# Altium PCB Top.PcbDoc
Units mm, origin at the board's own origin, x right, y up, seen from the top; angles counter-clockwise.
Board outline 42 x 21.72 mm, 2 copper layers (Top Layer, Bottom Layer), stack 1.671 mm thick; 35 components, 43 nets, 173 pads, 52 vias.
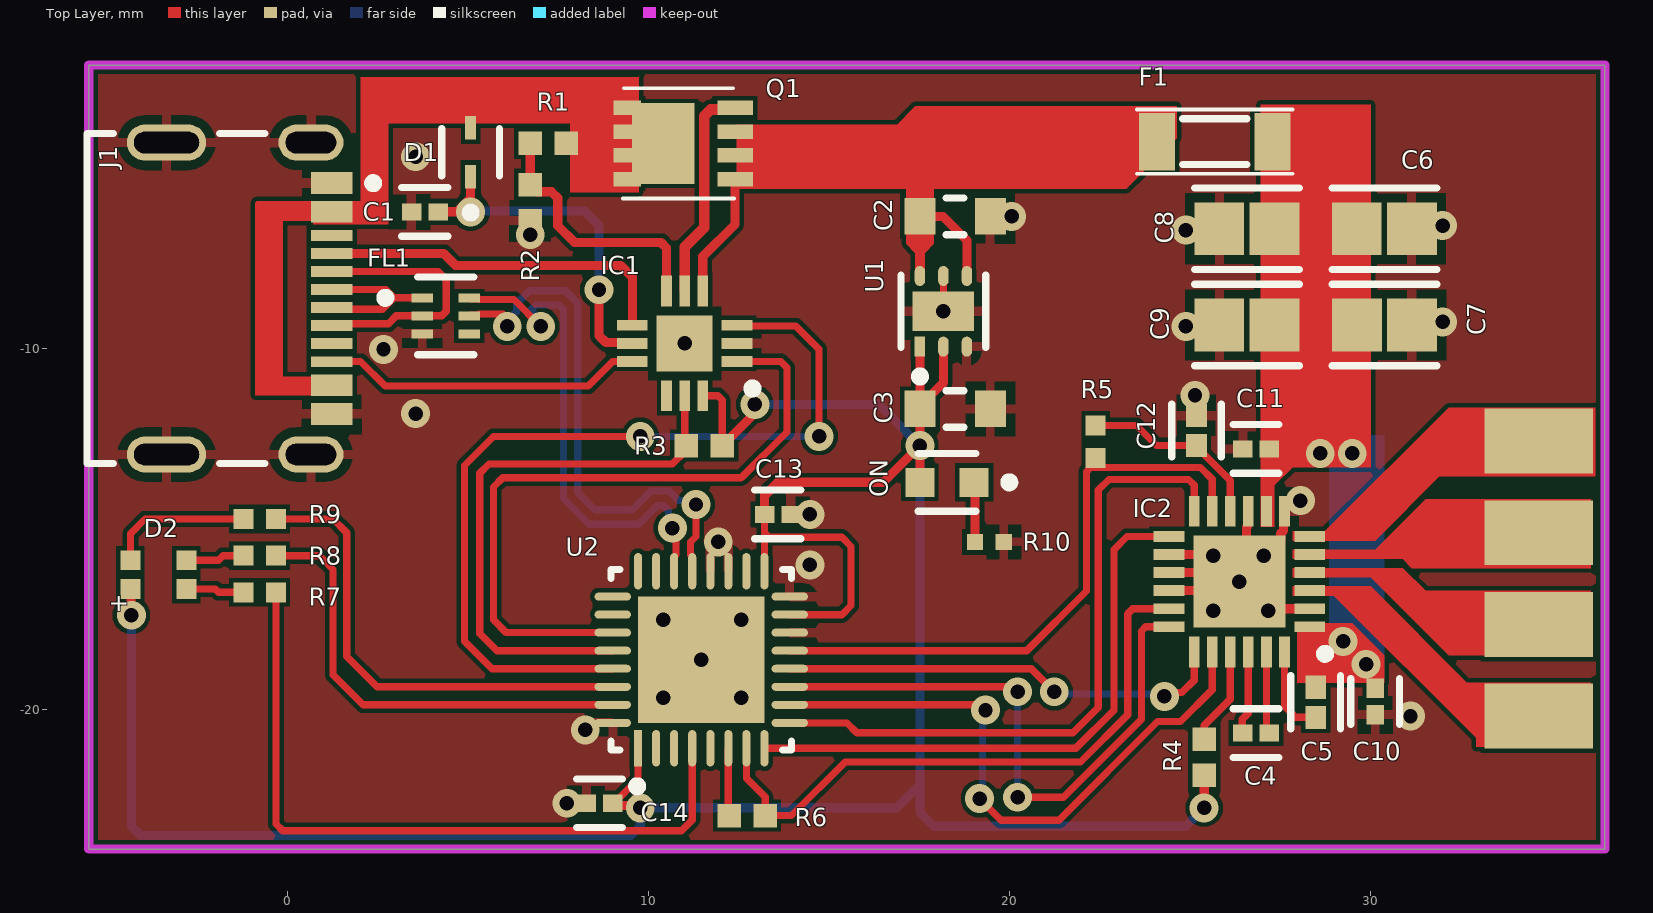
[diagram p0: Top Layer view]
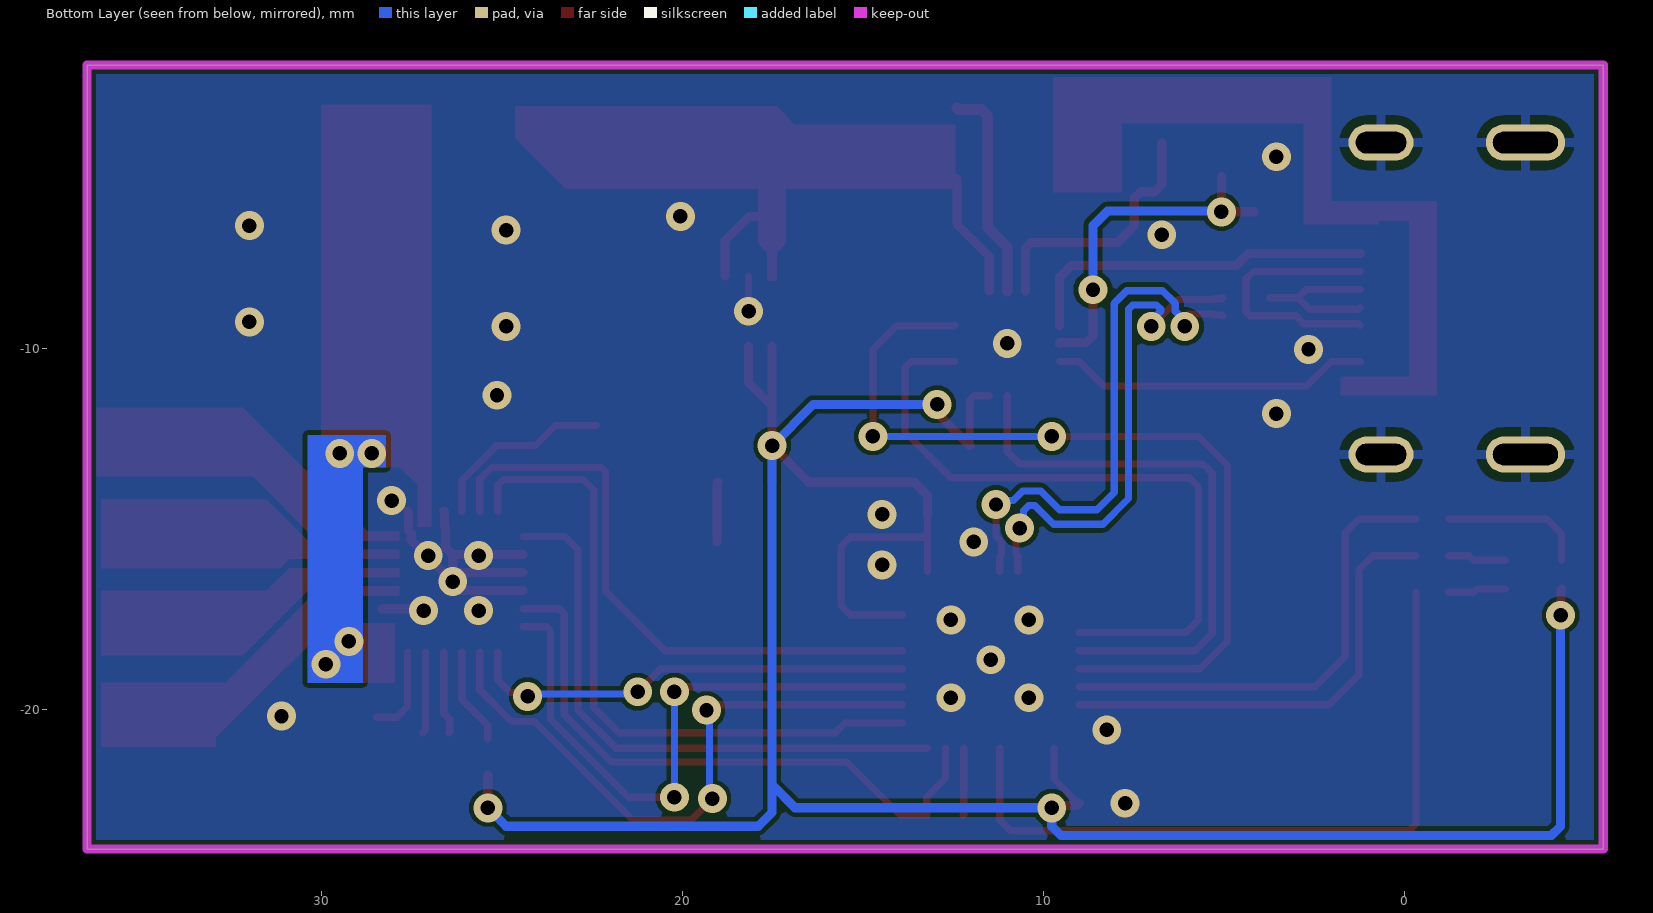
[diagram p1: Bottom Layer view, seen from below]
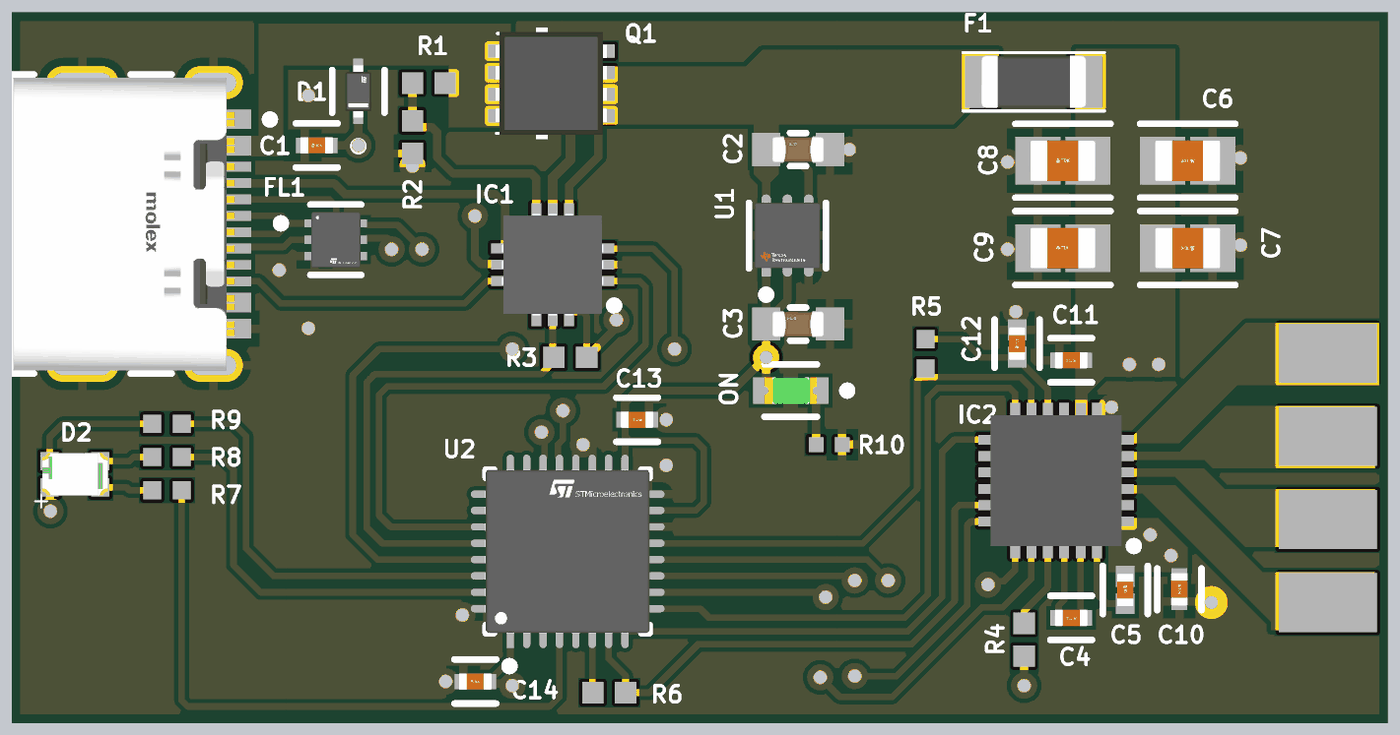
[diagram p2: 3D render of the assembled board from above, using the file's embedded part models]

## Layer stack, top to bottom
Top Solder: solder mask 0.0102, Solder Resist, Dk 3.5
Top Layer: signal copper 0.0356
Dielectric 1: dielectric 1.6, FR-4, Dk 4.8
Bottom Layer: signal copper 0.0356
Bottom Solder: solder mask 0.0102, Solder Resist, Dk 3.5

## Board outline
-5.5,-23.876 -5.5,-2.159 36.5,-2.159 36.5,-23.876

## Design rules (kind name [scope] priority, off if disabled: settings)
Clearance [All] p1: gap=0.127 ignorepadtopadclearanceinfootprint=FALSE
DiffPairsRouting [All] p1: maxlimit=0.254 minlimit=0.2 mostfreqgap=0.2 toplayer_minwidth=0.2 toplayer_maxwidth=0.3 toplayer_prefwidth=0.3 bottomlayer_minwidth=0.2 bottomlayer_maxwidth=0.3 bottomlayer_prefwidth=0.3 maxuncoupledlength=12.7
PolygonConnect [isvia] p1: connectstyle=Direct reliefconductorwidth=0.254 reliefentries=4 polygonreliefangle="90 Angle" airgapwidth=0.254
PolygonConnect PolygonConnect_1 [All] p2: connectstyle=Relief reliefconductorwidth=0.254 reliefentries=4 polygonreliefangle="90 Angle" airgapwidth=0.254
RoutingVias [All] p1: holewidth=0.4 width=0.8 viastyle="Through Hole" minholewidth=0.4 minwidth=0.8 maxholewidth=0.4 maxwidth=0.8
SilkToSilkClearance [All] p1: silktosilkclearance=0.1
SilkToSolderMaskClearance [IsPad] p1: minsilkscreentomaskgap=0.1 clearancetoexposedcopper=TRUE
SolderMaskExpansion [All] p1: expansion=0.102 istentingtop=FALSE
Width [All] p1: maxlimit=1 minlimit=0.2 preferedwidth=0.3
27 further rules are at their usual default settings.

## Classes and differential pairs
component class DRIVER: C4 C5 C6 C7 C8 C9 C10 C11 C12 DU1 F1 IC2 M1 R4 R5 R6
component class MCU: C13 C14 D2 R7 R8 R9 U2
component class USB_PD: C1 C2 C3 D1 FL1 IC1 J1 ON Q1 R1 R2 R3 R10 U1
differential pair USB_D: +USB_D_P -USB_D_N
differential pair USBC_D: +USBC_D_P -USBC_D_N

## Components (designator, comment, footprint, x,y, rotation, side; value= is the part's Value field where it differs from the comment)
C1 "C1005X7R1H104K050BB" FP-C1005-050-0_05-IPC_C 3.81,-6.223 r0 top
C2 "C1608X5R1E106M080AC" FP-C1608-080-IPC_A 18.501,-6.35 r180 top
C3 "C1608X5R1E106M080AC" FP-C1608-080-IPC_A 18.501,-11.684 r180 top
C4 "C1005X7R1H223K050BB" FP-C1005-050-0_05-IPC_C 26.836,-20.662 r180 top
C5 "C1005X7R1V224K050BC" FP-C1005-050-0_05-IPC_B 28.487,-19.809 r270 top
C6 "C2012X5R1V106K125AC" FP-C2012-125-0_2-IPC_B 30.39,-6.692 r180 top
C7 "C2012X5R1V106K125AC" FP-C2012-125-0_2-IPC_B 30.394,-9.359 r180 top
C8 "C2012X5R1V106K125AC" FP-C2012-125-0_2-IPC_B 26.584,-6.692 r0 top
C9 "C2012X5R1V106K125AC" FP-C2012-125-0_2-IPC_B 26.584,-9.359 r0 top
C10 "C1005X7R1H104K050BB" FP-C1005-050-0_05-IPC_C 30.138,-19.787 r270 top
C11 "C1005X7R1H104K050BB" FP-C1005-050-0_05-IPC_C 26.836,-12.788 r180 top
C12 "C1005X5R1V474K050BC" FP-C1005-050-0_05-IPC_B 25.185,-12.28 r90 top
C13 "C1005X7R1H104K050BB" FP-C1005-050-0_05-IPC_C 13.589,-14.605 r180 top
C14 "C1005X7R1H104K050BB" FP-C1005-050-0_05-IPC_C 8.65,-22.606 r0 top
D1 "BAT54KFILM" FP-SOD-523-MFG 5.08,-4.572 r90 top value=7pF
D2 "LED-RGB" XL-2012RGBC -3.569,-16.275 r0 top
F1 "" R1206 25.693,-4.279 r0 top
FL1 "ECMF02-2AMX6" FP-QFN-6L-MFG 4.391,-9.105 r0 top
IC1 "TCPP01-M12" QFN50P300X300X100-13N-D 11.01,-9.867 r180 top
IC2 "DRV8424RGER" QFN50P400X400X100-25N-D 26.373,-16.467 r180 top
J1 "217179-0001" FP-2171790001-MFG -2.194,-8.625 r270 top
ON "LTST-C191KGKT" FP-LTST-C191KGKT-MFG 18.276,-13.716 r180 top
Q1 "SI7804DN-T1-E3" SIS862DNT1GE3 10.852,-4.328 r180 top
R1 "ERJ-2GEJ103X" RESC1005X40X25ML05T05 7.231,-4.318 r0 top
R2 "ERJ-2GEJ911X" RESC1005X40X25ML05T05 6.731,-5.969 r90 top
R3 "ERJ-2GEJ103X" RESC1005X40X25ML05T05 11.549,-12.7 r0 top
R4 "ERJ-2GEJ103X" RESC1005X40X25ML05T05 25.4,-21.328 r90 top
R5 "ERJ-2GEJ152X" RESC1005X40X25NL05T05 22.391,-12.592 r270 top
R6 "ERJ-2GEJ334X" RESC1005X40X25ML05T05 12.739,-22.948 r0 top
R7 "ERJ-2GEJ331X" RESC1005X40X25NL05T05 -0.762,-16.764 r180 top
R8 "ERJ-2GEJ331X" RESC1005X40X25NL05T05 -0.762,-15.748 r180 top
R9 "ERJ-2GEJ331X" RESC1005X40X25NL05T05 -0.762,-14.732 r180 top
R10 "ERJ2RKF2200X" RESC1005X40X25LL05T05 19.45,-15.367 r0 top
U1 "TLV76733DRVR" FP-DRV0006A-IPC_C 18.176,-8.979 r90 top
U2 "STM32G431KBU6" FP-UFQFPN32-A0B8-IPC_A 11.469,-18.63 r90 top

## Footprints (in the part's own frame and the unit in brackets; to place one, negate y for a bottom-side part, rotate by r counter-clockwise, add the part's x,y. Pads: shape width x height; smd on the part's side, far side on the other; paste and mask are expansions set on the pad)
FP-2171790001-MFG [mm]
  rrect100% 1x1.8 hole 1.4 slot 0.6 at 0 deg paste-2539.97 mask+0: 1(-4.32,2.85) 2(4.32,2.85)
  rrect100% 1x2.2 hole 1.8 slot 0.6 at 0 deg paste-2539.97 mask+0: 3(-4.32,-1.15) 4(4.32,-1.15)
  rect 0.6x1.15 smd paste+0 mask+0: A1-B12(-3.2,3.425) A4-B9(-2.4,3.425) B1-A12(3.2,3.425) B4-A9(2.4,3.425)
  rect 0.3x1.15 smd paste+0 mask+0: A5(-1.25,3.425) A6(-0.25,3.425) A7(0.25,3.425) A8(1.25,3.425) B5(1.75,3.425) B6(0.75,3.425) B7(-0.75,3.425) B8(-1.75,3.425)
  silkscreen extent -4.57,-3.35 4.57,4.7, body extent -4.92,-3.45 4.92,4.1, height 0.25
FP-C1005-050-0_05-IPC_B [mm]
  rect 0.639x0.572 smd paste+0 mask+0: 1(-0.417,0) 2(0.417,0)
  silkscreen extent -0.74,-0.69 0.74,0.69, body extent -0.89,-0.44 0.89,0.44, height 0.25
FP-C1005-050-0_05-IPC_C [mm]
  rect 0.539x0.472 smd paste+0 mask+0: 1(-0.367,0) 2(0.367,0)
  silkscreen extent -0.64,-0.67 0.64,0.67, body extent -0.74,-0.38 0.74,0.38, height 0.25
FP-C1608-080-IPC_A [mm]
  rect 0.862x1.012 smd paste+0 mask+0: 1(-0.975,0) 2(0.975,0)
  silkscreen extent -0.24,-0.51 0.24,0.51, body extent -1.91,-1.01 1.91,1.01, height 0.25
FP-C2012-125-0_2-IPC_B [mm]
  rect 1.378x1.456 smd paste+0 mask+0: 1(-0.764,0) 2(0.764,0)
  silkscreen extent -1.45,-1.13 1.45,1.13, body extent -1.7,-0.98 1.7,0.98, height 0.25
FP-DRV0006A-IPC_C [mm]
  rect 0.556x0.292 smd paste+0 mask+0: 1(-0.978,0.65)
  rrect100% 0.556x0.292 smd paste+0 mask+0: 2(-0.978,0) 3(-0.978,-0.65) 4(0.978,-0.65) 5(0.978,0) 6(0.978,0.65)
  rect 1.1x1.7 smd paste-1000 mask+0: 7(0,0)
  silkscreen extent -1.93,-1.17 1,1.17, body extent -1.36,-1.1 1.36,1.1, height 0.25
FP-LTST-C191KGKT-MFG [mm]
  rect 0.8x0.8 smd paste+0 mask+0: 1(-0.75,0) 2(0.75,0)
  silkscreen extent -1.85,-0.8 0.8,0.8, body extent -1.25,-0.55 1.25,0.55, height 0.25
FP-QFN-6L-MFG [mm]
  rect 0.6x0.25 smd paste+0 mask+0: 1(-0.65,0.5) 2(-0.65,0) 3(-0.65,-0.5) 4(0.65,-0.5) 5(0.65,0) 6(0.65,0.5)
  silkscreen extent -1.8,-1.07 0.77,1.07, body extent -1.05,-0.97 1.05,0.97, height 0.25
FP-SOD-523-MFG [mm]
  rect 0.65x0.3 smd paste+0 mask+0: 1(-0.675,0) 2(0.675,0)
  silkscreen extent -1.8,-0.8 0.65,0.8, body extent -1.1,-0.55 1.1,0.55, height 0.25
FP-UFQFPN32-A0B8-IPC_A [mm]
  rect 1.01x0.222 smd paste+0 mask+0: 1(-2.451,1.75)
  rrect100% 1.01x0.222 smd paste+0 mask+0: 2(-2.451,1.25) 3(-2.451,0.75) 4(-2.451,0.25) 5(-2.451,-0.25) 6(-2.451,-0.75) 7(-2.451,-1.25) 8(-2.451,-1.75) 17(2.451,-1.75) 18(2.451,-1.25) 19(2.451,-0.75) 20(2.451,-0.25) 21(2.451,0.25) 22(2.451,0.75) 23(2.451,1.25) 24(2.451,1.75)
  rrect100% 0.222x1.01 smd paste+0 mask+0: 9(-1.75,-2.451) 10(-1.25,-2.451) 11(-0.75,-2.451) 12(-0.25,-2.451) 13(0.25,-2.451) 14(0.75,-2.451) 15(1.25,-2.451) 16(1.75,-2.451) 25(1.75,2.451) 26(1.25,2.451) 27(0.75,2.451) 28(0.25,2.451) 29(-0.25,2.451) 30(-0.75,2.451) 31(-1.25,2.451) 32(-1.75,2.451)
  rect 3.5x3.5 smd paste-1000 mask+0: 33(0,0)
  silkscreen extent -3.63,-2.5 2.5,2.5, body extent -3.46,-3.46 3.46,3.46, height 0.25
QFN50P300X300X100-13N-D [mm]
  rect 0.85x0.3 smd: 1(-1.45,0.5) 2(-1.45,0) 3(-1.45,-0.5) 7(1.45,-0.5) 8(1.45,0) 9(1.45,0.5)
  rect 0.3x0.85 smd: 4(-0.5,-1.45) 5(0,-1.45) 6(0.5,-1.45) 10(0.5,1.45) 11(0,1.45) 12(-0.5,1.45)
  rect 1.55x1.55 smd: 13(0,0)
  silkscreen extent -2,1.13 -1.75,1.37, body extent -1.55,-1.55 1.55,1.55, height 1
QFN50P400X400X100-25N-D [mm]
  rect 0.85x0.3 smd: 1(-1.95,1.25) 2(-1.95,0.75) 3(-1.95,0.25) 4(-1.95,-0.25) 5(-1.95,-0.75) 6(-1.95,-1.25) 13(1.95,-1.25) 14(1.95,-0.75) 15(1.95,-0.25) 16(1.95,0.25) 17(1.95,0.75) 18(1.95,1.25)
  rect 0.3x0.85 smd: 7(-1.25,-1.95) 8(-0.75,-1.95) 9(-0.25,-1.95) 10(0.25,-1.95) 11(0.75,-1.95) 12(1.25,-1.95) 19(1.25,1.95) 20(0.75,1.95) 21(0.25,1.95) 22(-0.25,1.95) 23(-0.75,1.95) 24(-1.25,1.95)
  rect 2.55x2.55 smd: 25(0,0)
  silkscreen extent -2.5,1.88 -2.25,2.12, body extent -2,-2 2,2, height 1
R1206 [mm]
  rect 1x1.6 smd: 1(1.6,0) 2(-1.6,0)
  silkscreen extent -2.16,-0.89 2.16,0.89, body extent -1.6,-0.8 1.6,0.8, height 1
RESC1005X40X25LL05T05 [mm] "Chip Resistor, 2-Leads, Body 1.00x0.50mm, IPC High Density"
  rect 0.45x0.45 smd: 1(-0.4,0) 2(0.4,0)
  body extent -0.53,-0.27 0.53,0.28, height 0.4
RESC1005X40X25ML05T05 [mm] "Chip Resistor, 2-Leads, Body 1.00x0.50mm, IPC Low Density"
  rect 0.65x0.65 smd: 1(-0.5,0) 2(0.5,0)
  body extent -0.53,-0.27 0.53,0.28, height 0.4
RESC1005X40X25NL05T05 [mm] "Chip Resistor, 2-Leads, Body 1.00x0.50mm, IPC Medium Density"
  rect 0.55x0.55 smd: 1(-0.45,0) 2(0.45,0)
  body extent -0.53,-0.27 0.53,0.28, height 0.4
SIS862DNT1GE3 [mm]
  rect 0.99x0.405 smd: 1(-1.555,0.992) 2(-1.555,0.332) 3(-1.555,-0.328) 4(-1.555,-0.988)
  rect 0.51x0.405 smd: 5(1.555,-0.988) 6(1.555,-0.328) 7(1.555,0.332) 8(1.555,0.992)
  rect 1.725x2.235 smd: 9(0.438,0.002)
  rect 0.25x0.077 smd: 10(1.175,-1.156) 11(1.175,1.156)
  silkscreen extent -1.53,-1.53 1.56,1.53, body extent -1.82,-1.7 1.59,1.7, height 1.12
XL-2012RGBC [mm]
  rect 0.55x0.55 smd: 1(-0.775,0.4) 2(0.775,0.4) 3(-0.775,-0.4) 4(0.775,-0.4)
  body extent -1,-0.65 1,0.65, height 0.5

## Part data
C1 C10 C11 C13 C14: library part CMP-2000-05393-2, "Multilayer Ceramic Capacitors 100nF ±10% 50V X7R SMD 0402", Capacitance=100nF, Case Code (Imperial)=0402, Case Code (Metric)=1005, Dielectric=X7R, Dielectric Material=Ceramic, Max Operating Temperature=125°C, Min Operating Temperature=-55°C, Package Quantity=1, Tolerance=10%, Voltage=50V, Case/Package=0402, Construction=Flat, Depth=0.5mm, Height=0.5mm, Lead Free="Lead Free", Length=1mm, Mount="Surface Mount", Packaging="Tape and Reel", Radiation Hardening=No, REACH SVHC="No SVHC", Resistor Type=Ceramic, RoHS Compliant=Yes, Series=C, Termination=SMD/SMT, Thickness=0.022inch, Voltage Rating=50V, Voltage Rating (DC)=50V, Weight=2.3E-05oz, Width=0.02inch
C2 C3: library part CMP-2000-05442-2, "CAP CER 10UF 25V X5R 0603", Capacitance=10uF, Case Code (Imperial)=0603, Case Code (Metric)=1608, Dielectric=X5R, Dielectric Material=Ceramic, Max Operating Temperature=85°C, Min Operating Temperature=-55°C, Package Quantity=1, Tolerance=20%, Voltage Rating=25V, Case/Package=0603, Construction=Flat, Depth=0.8mm, Height=0.8mm, Lead Free="Lead Free", Length=1.6mm, Mount="Surface Mount", Packaging="Tape and Reel", REACH SVHC="No SVHC", Resistor Type=Ceramic, RoHS Compliant=Yes, Series=C, Termination=SMD/SMT, Thickness=0.039inch, Voltage Rating (DC)=25V, Weight=7.1E-05oz, Width=0.8mm
C4: library part CMP-08246-004483-1, "Multilayer Ceramic Capacitors 22nF ±10% 50V X7R SMD 0402", Capacitance=22nF, Case Code (Imperial)=0402, Case Code (Metric)=1005, Dielectric=X7R, Dielectric Material=Ceramic, Max Operating Temperature=125°C, Min Operating Temperature=-55°C, Package Quantity=1, Tolerance=10%, Voltage Rating=50V, Case/Package=0402, Construction=Flat, Depth=0.5mm, Height=0.5mm, Lead Free="Lead Free", Length=1mm, Mount="Surface Mount", Number of Pins=2, Packaging="Tape and Reel", Radiation Hardening=No, REACH SVHC="No SVHC", Resistor Type=Ceramic, RoHS Compliant=Yes, Series=C, Termination=SMD/SMT, Thickness=0.022inch, Voltage Rating (DC)=50V, Weight=2.3E-05oz, Width=0.02inch
C5: library part CMP-08246-006551-1, "Multilayer Ceramic Capacitors 220nF ±10% 35V X7R SMD 0402", Capacitance=220nF, Case Code (Imperial)=0402, Case Code (Metric)=1005, Dielectric=X7R, Dielectric Material=Ceramic, Max Operating Temperature=125°C, Min Operating Temperature=-55°C, Package Quantity=10000, Tolerance=10%, Voltage Rating=35V, Case/Package=0402, Height=0.5mm, Lead Free="Lead Free", Length=0.039inch, Mount="Surface Mount", Packaging="Tape and Reel", RoHS Compliant=Yes, Termination=SMD/SMT, Thickness=0.022inch, Voltage Rating (DC)=35V, Weight=2.3E-05oz, Width=0.02inch
C6 C7 C8 C9: library part CMP-08246-003469-1, "Multilayer Ceramic Capacitors 10μF ±10% 35V X5R SMD 0805", Capacitance=10uF, Case Code (Imperial)=0805, Case Code (Metric)=2012, Dielectric=X5R, Dielectric Material=Ceramic, Max Operating Temperature=85°C, Min Operating Temperature=-55°C, Package Quantity=2000, Tolerance=10%, Voltage Rating=35V, Case/Package=0805, Height=1.25mm, Lead Free="Lead Free", Length=0.079inch, Mount="Surface Mount", Packaging="Tape and Reel", REACH SVHC="No SVHC", RoHS Compliant=Yes, Series=C, Termination=SMD/SMT, Thickness=0.057inch, Voltage Rating (DC)=35V, Weight=0.000194oz, Width=1.25mm
C12: library part CMP-08246-003870-1, "Multilayer Ceramic Capacitors 470nF ±10% 35V X5R SMD 0402", Capacitance=470nF, Case Code (Imperial)=0402, Case Code (Metric)=1005, Dielectric=X5R, Dielectric Material=Ceramic, Max Operating Temperature=85°C, Min Operating Temperature=-55°C, Package Quantity=10000, Tolerance=10%, Voltage Rating=35V, Case/Package=0402, Height=0.5mm, Lead Free="Lead Free", Length=0.039inch, Mount="Surface Mount", Packaging="Tape and Reel", RoHS Compliant=Yes, Series=C, Termination=SMD/SMT, Thickness=0.022inch, Voltage Rating (DC)=35V, Weight=2.3E-05oz, Width=0.02inch
D1: library part CMP-12187-000026-1, "DIODE SCHOTTKY 40V 300MA SOD523", Capacitance=7pF, Forward Current=300mA, Manufacturer=STMicroelectronics, Max Junction Temp=+150°C, Max Repetitive Reverse Voltage=40V, Max Surge Forward Current=1.25A, Package=SOD-523, Peak Reverse Current=1uA, Temperature="-40°C to +150°C", Temperature Range Low=-40°C, Automotive=No, Category=Diode, ComponentLink2Description=Datasheet, ComponentLink2URL=https://www.st.com/content/ccc/resource/technical/document/datasheet/07/50/54/f2/0d/ba/4a/79/CD00001322.pdf/files/CD00001322.pdf/jcr:content/translations/en.CD00001322.pdf, Device Class L1="Discrete Semiconductors", Device Class L2=Diodes, Device Class L3="Schottky Diodes", Digikey Description="DIODE SCHOTTKY 40V 300MA SOD523", Height=0.7mm, Lead Free=Yes, Manufacturer Part Number=BAT54KFILM, Mouser Description="Schottky Diodes & Rectifiers schottky diode", Octopart=https://octopart.com/bat54kfilm-stmicroelectronics-39618022, RoHS=TRUE, Temperature Range High=+150°C
D2: library part XL-2012RGBC
F1: library part PTC, "PTC", PackageReference=6-0805, PackageVersion=Mar-2003, Published=24-Mar-1999
FL1: library part CMP-12075-000001-1, "CMC 200MA 2LN SMD ESD", Manufacturer=STMicroelectronics, Max Junction Temp=+125°C, Package=QFN-6L, Series Resistance=2.5Ω, Temperature="-55°C to +125°C", Temperature Range Low=-55°C, Automotive=No, Category=Filter, ComponentLink2Description=Datasheet, ComponentLink2URL=https://www.st.com/resource/en/datasheet/ecmf02-2amx6.pdf, Device Class L1="Passive Components", Device Class L2="EMI / RFI Components", Device Class L3="Common Mode Chokes", Digikey Description="CMC 200MA 2LN SMD ESD", Height=0.55mm, Ipc Land Pattern Name=DFN170X150X50-6, Lead Free=Yes, Manufacturer Part Number=ECMF02-2AMX6, Mouser Description="TVS Diodes / ESD Suppressors ESD Mode Filter 6GHz USB 2.0 MIPI 8kV", Octopart=https://octopart.com/ecmf02-2amx6-stmicroelectronics-44353078, RoHS=TRUE, Standoff Height=0mm, Temperature Range High=+125°C
IC1: "Integrated Circuit", Manufacturer_Name=STMicroelectronics, Mouser Part Number=511-TCPP01-M12, Arrow Part Number=TCPP01-M12, Arrow Price/Stock=https://www.arrow.com/en/products/tcpp01-m12/stmicroelectronics?utm_currency=USD&region=nac, Datasheet Link=https://www.st.com/resource/en/datasheet/tcpp01-m12.pdf, Height=1mm, Manufacturer_Part_Number=TCPP01-M12, Mouser Price/Stock=https://www.mouser.co.uk/ProductDetail/STMicroelectronics/TCPP01-M12?qs=%252B6g0mu59x7KCafIwapwG2A%3D%3D
IC2: "Integrated Circuit", Manufacturer_Name="Texas Instruments", Mouser Part Number=595-DRV8424RGER, Arrow Part Number=DRV8424RGER, Arrow Price/Stock=null?region=nac, Datasheet Link=https://www.ti.com/lit/ds/symlink/drv8424e.pdf?ts=1606468050255, Height=1mm, Manufacturer_Part_Number=DRV8424RGER, Mouser Price/Stock=https://www.mouser.co.uk/ProductDetail/Texas-Instruments/DRV8424RGER?qs=zW32dvEIR3vjkIn0AjQrCA%3D%3D
J1: library part CMP-04767-000028-2, "CONN RCP USB2.0 TYP C 24P SMD RA", Current Rating=1.25A, Max Operating Temperature=85°C, Min Operating Temperature=-40°C, Voltage Rating=30V, Contact Material="Gold, Nickel", Gender=Receptacle, Height=3.36mm, NexarPartId=117190526, Number of Contacts=16, USB Standard="USB 2.0"
ON: library part CMP-2000-05198-4, Case Code (Imperial)=0603, Case Code (Metric)=1608, Color=Green, Forward Current=20mA, Forward Voltage=2V, Lens Color="Clear, Colorless", Max Operating Temperature=85°C, Min Operating Temperature=-55°C, Power Dissipation=75mW, Reverse Voltage=5V, Case/Package=0603, Depth=800µm, Dominant Wavelength=571nm, Height=550µm, Illumination Color=Green, Lead Free="Lead Free", Length=1.6mm, Lens Style=Clear, Lens Transparency=Clear, Luminous Intensity=35mcd, Mount="Surface Mount", NexarPartId=549907, Number of Elements=1, Number of LEDs=1, Number of Pins=2, Packaging="Tape and Reel", Power Rating=75mW, Radiation Hardening=No, RoHS=Compliant, Schedule B="8541402000, 8541402000", Test Current=20mA, Viewing Angle=130°, Wavelength=574nm, Width=800µm
Q1: "MOSFET (N-Channel)", Manufacturer_Name=Vishay, Mouser Part Number=781-SI7804DN-T1-E3, Arrow Part Number=SI7804DN-T1-E3, Arrow Price/Stock=https://www.arrow.com/en/products/si7804dn-t1-e3/vishay, Datasheet Link=https://componentsearchengine.com/Datasheets/1/SI7804DN-T1-E3.pdf, Height=1.12mm, Manufacturer_Part_Number=SI7804DN-T1-E3, Mouser Price/Stock=https://www.mouser.co.uk/ProductDetail/Vishay-Semiconductors/SI7804DN-T1-E3?qs=jcx%252B0HVgj2biudZDRPx5dA%3D%3D
R1 R3 R4: library part CMP-2002-00433-1, Manufacturer=Panasonic, RESISTANCE=10K, Part Number=ERJ-2GEJ103X
R2: library part CMP-1011-00073-2, Manufacturer=Panasonic, ERJ-2GEJ103X=910, Part Number=ERJ-2GEJ911X
R5: library part CMP-1011-00078-2, Manufacturer=Panasonic, RESISTANCE=1.5K, Part Number=ERJ-2GEJ152X
R6: library part CMP-1011-00134-2, Manufacturer=Panasonic, Part Number=ERJ-2GEJ334X
R7 R8 R9: library part CMP-2002-00515-1, Manufacturer=Panasonic, RESISTANCE=330, Part Number=ERJ-2GEJ331X
R10: library part CMP-2002-01131-1, Manufacturer=Panasonic, RESISTANCE=220, Part Number=ERJ2RKF2200X
U1: library part CMP-04917-000203-1, "VOLTAGE COMPARATOR"
U2: library part CMP-12105-000119-1, "IC MCU 32BIT 128KB FLSH 32UFQFPN", RoHS Compliant=Yes

## Free pads (board coordinates)
  rect 3x1.8 smd: 1(34.671,-20.193) 2(34.671,-17.653) 3(34.671,-15.113) 4(34.671,-12.573)

## Via types
v1: diameter 0.8, hole 0.4, Top Layer to Bottom Layer, tented both sides, 44 vias
v2: diameter 0.8, hole 0.4, Top Layer to Bottom Layer, 8 vias

## Nets (pads, with @x,y where several pads share a name; then routed paths per layer and width w, separated by ;. In a path a pad name is that pad's centre, name@x,y a point inside that pad or via, vN(x,y) a via of type N, cw(c..) or ccw(c..) an arc to the next point about the centre after c; other vN are vias at no path point)
+3V3: C3.2 C13.2 C14.2 D2.3 IC1.12 ON.2 R3.2 R4.1 U1.1 U1.2 U2.1 U2.15 U2.17 | length 78.4
  Top Layer w0.2: C14.2 9.05,-22.606 9.719,-21.937 U2.1 ; IC1.12 11.932,-11.317 12.049,-11.434 R3.2 ; U2.17 13.221,-16.177 13.221,-15.113 ; C13.2@13.221,-14.607 13.221,-15.113 ; U2.15 13.923,-17.382 15.367,-17.382 15.619,-17.131 15.619,-15.492 15.367,-15.24 13.348,-15.24 13.221,-15.113
  Top Layer w0.254: D2.3 -4.331,-16.688 -4.331,-17.386 v1(-4.318,-17.399) ; C14.2 9.08,-22.669 9.716,-22.669 v1(9.779,-22.733) ; R3.2 12.85,-11.899 12.85,-11.661 v1(12.954,-11.557) ; C13.2@13.221,-14.607 13.221,-14.084 13.589,-13.716 16.51,-13.716 v2(17.526,-12.7) ; ON.2 v2(17.526,-12.7) ; U1.1 C3.2@17.526,-11.609 ; U1.2 18.176,-10.959 C3.2@17.526,-11.609 ; v1(25.4,-22.733) R4.1 ; v2(17.526,-12.7) C3.2 C3.2@17.526,-11.609
  Bottom Layer w0.254: v1(-4.318,-17.399) -4.318,-23.241 -4.064,-23.495 9.525,-23.495 9.779,-23.241 v1(9.779,-22.733) 16.891,-22.733 17.526,-22.098 ; v1(12.954,-11.557) 16.383,-11.557 v2(17.526,-12.7) 17.526,-22.098 ; v1(25.4,-22.733) 24.892,-23.241 17.907,-23.241 17.526,-22.86 17.526,-22.098
BMA1: IC2.3 pad.1
BMA2: IC2.4 pad.2
BMB1: IC2.5 pad.3
BMB2: IC2.6 pad.4
CC1: IC1.3 U2.29 | length 24.4
  Top Layer w0.2: U2.29 5.672,-18.88 4.909,-18.117 4.909,-13.252 5.715,-12.446 v1(9.779,-12.446) ; IC1.3 12.475,-9.383 14.082,-9.383 14.732,-10.033 v1(14.732,-12.446)
  Bottom Layer w0.2: v1(9.779,-12.446) v1(14.732,-12.446)
CC1_C: IC1.7 J1.A5 | length 9.9
  Top Layer w0.254: J1.A5 4.327,-7.375 4.66,-7.708 9.232,-7.708 9.56,-8.036 IC1.7
CC2: IC1.1 U2.27 | length 19.1
  Top Layer w0.2: U2.27 6.069,-17.88 5.715,-17.526 5.715,-13.843 5.969,-13.589 12.573,-13.589 13.843,-12.319 13.843,-10.541 13.669,-10.367 IC1.1
CC2_C: IC1.9 J1.B5 | length 8.9
  Top Layer w0.2: J1.B5 1.239,-10.367 2.032,-10.367 2.714,-11.049 8.335,-11.049 9.017,-10.367 IC1.9
DAC1_OUT1: IC2.12 U2.9 | length 18.5
  Top Layer w0.2: U2.9 15.505,-20.38 15.779,-20.654 21.764,-20.654 22.464,-19.954 22.464,-13.931 22.76,-13.635 24.966,-13.635 25.123,-13.792 IC2.12
DIR: IC2.19 U2.12 | length 12.5
  Top Layer w0.2: U2.12 20.609,-18.88 v1(21.248,-19.519) ; v1(24.296,-19.646) 24.4,-19.542 24.781,-19.542 25.123,-19.2 IC2.19
  Bottom Layer w0.2: v1(21.248,-19.519) 21.311,-19.583 24.232,-19.583 v1(24.296,-19.646)
DRV_FLT: IC2.11 R5.2 U2.13 | length 16.8
  Top Layer w0.2: U2.13 20.482,-18.38 22.137,-16.725 22.137,-13.425 22.254,-13.308 25.3,-13.308 25.623,-13.63 IC2.11
DVDD: C12.1 IC2.10 R5.1 | length 5.2
  Top Layer w0.2: R5.1 23.523,-12.142 24.078,-12.697 C12.1 25.185,-12.73 26.123,-13.668 IC2.10
EN: IC2.20 U2.10 | length 17.2
  Top Layer w0.2: U2.10 19.034,-19.88 19.181,-20.027 v1(19.343,-20.027) ; v1(19.177,-22.479) 19.773,-23.075 21.375,-23.075 24.105,-20.345 24.74,-20.345 25.623,-19.462 IC2.20
  Bottom Layer w0.2: v1(19.177,-22.479) 19.26,-22.396 19.26,-20.11 v1(19.343,-20.027)
GND: C1.1 C2.1 C3.1 C6.1 C7.1 C8.1 C9.1 C10.2 C11.2 C12.2 C13.1 C14.1 FL1.3 IC1.2 IC1.13 IC2.2 IC2.7 IC2.9 IC2.14 IC2.15 IC2.16 IC2.25 J1.1 J1.2 J1.3 J1.4 J1.A1-B12 J1.B1-A12 R2.1 R10.2 U1.3 U1.5 U1.7 U2.14 U2.16 U2.19 U2.20 U2.32 U2.33 | length 12.8
  Top Layer w0.2: v1(18.176,-8.979) U1.5
  Top Layer w0.254: IC2.16 26.373,-16.717 v2(26.373,-16.467) ; IC2.15 IC2.25@26.373,-16.217 ; IC2.14 IC2.25@26.373,-15.717 ; IC2.9 26.6,-14.54 26.6,-14.935 26.576,-14.96 26.576,-15.514 IC2.25@26.373,-15.717 ; v2(27.178,-17.272) 27.178,-17.217 IC2.2 ; IC2.7 27.6,-14.54 27.6,-14.967 27.598,-14.969 27.598,-15.052 27.521,-15.129 27.521,-15.319 27.092,-15.748 v2(27.051,-15.748) 27.051,-15.789 v2(26.373,-16.467) ; v2(26.373,-16.467) IC2.25@26.373,-16.217 ; IC2.25@26.373,-16.217 IC2.25@26.373,-15.717
  other v1: 7.747,-22.606 8.255,-20.574 10.414,-19.685 12.573,-19.685 11.469,-18.63 10.414,-17.526 12.573,-17.526 14.478,-16.002 11.938,-15.367 14.478,-14.605 28.067,-14.224 3.556,-11.811 25.146,-11.303 2.667,-10.033 24.892,-9.398 32.004,-9.271 6.731,-6.858 24.892,-6.731 32.004,-6.604 20.066,-6.35 3.556,-4.699
  other v2: 31.115,-20.193 25.654,-17.272 25.654,-15.748 11.01,-9.867
M0: IC2.13 U2.8 | length 16.2
  Top Layer w0.2: U2.8 21.845,-21.081 22.899,-20.027 22.899,-15.582 23.264,-15.217 IC2.13
M1: IC2.17 R6.2 U2.7 | length 17.3
  Top Layer w0.2: U2.7 12.719,-21.912 13.239,-22.432 R6.2 13.97,-22.948 15.455,-21.463 21.971,-21.463 23.28,-20.154 23.28,-17.36 23.423,-17.217 IC2.17
M2: R6.1 U2.6 | length 1.9
  Top Layer w0.2: U2.6 12.219,-22.928 R6.1
NetC1_2: C1.2 D1.1 IC1.8 | length 9.8
  Top Layer w0.254: C1.2 4.699,-6.223 v1@5.08,-5.842 ; v1(5.08,-6.223) v1@5.08,-5.842 ; D1.1 v1@5.08,-5.842 ; v1(8.636,-8.382) 8.636,-9.652 8.828,-9.844 9.537,-9.844 IC1.8
  Bottom Layer w0.254: v1(5.08,-6.223) 5.099,-6.204 8.236,-6.204 8.636,-6.604 v1(8.636,-8.382)
NetC4_1: C4.1 IC2.23 | length 2.3
  Top Layer w0.2: IC2.23 27.123,-20.582 C4.1
NetC4_2: C4.2 IC2.22 | length 2.3
  Top Layer w0.2: C4.2 26.455,-20.648 26.455,-20.281 26.623,-20.113 IC2.22
NetC5_2: C5.2 IC2.24 | length 2.5
  Top Layer w0.2: IC2.24 27.623,-19.925 27.923,-20.225 C5.2
NetD2_1: D2.1 R9.2 | length 4
  Top Layer w0.2: D2.1 -4.344,-15.139 -3.937,-14.732 R9.2
NetD2_2: D2.2 R8.2 | length 1.6
  Top Layer w0.2: D2.2 -1.905,-15.875 -1.778,-15.748 R8.2
NetD2_4: D2.4 R7.2 | length 1.6
  Top Layer w0.2: D2.4 -1.994,-16.675 -1.905,-16.764 R7.2
NetIC1_5: IC1.5 Q1.4 | length 6
  Top Layer w0.3: IC1.5 11.01,-7.2 11.553,-6.657 11.553,-3.568 11.729,-3.393 12.354,-3.393 Q1.4
NetIC2_21: IC2.21 R4.2 | length 2.7
  Top Layer w0.2: R4.2 25.4,-20.447 26.123,-19.724 IC2.21
NetON_1: ON.1 R10.1 | length 1.7
  Top Layer w0.254: ON.1 19.05,-13.74 R10.1
NetR7_1: R7.1 U2.4 | length 20.1
  Top Layer w0.2: R7.1 -0.312,-23.183 -0.127,-23.368 10.922,-23.368 11.219,-23.071 U2.4
NetR8_1: R8.1 U2.31 | length 12.8
  Top Layer w0.2: R8.1 0.889,-15.748 1.27,-16.129 1.27,-19.05 2.1,-19.88 U2.31
NetR9_1: R9.1 U2.30 | length 13.3
  Top Layer w0.2: R9.1 1.27,-14.732 1.651,-15.113 1.651,-18.542 2.489,-19.38 U2.30
PD_F\L\T\: IC1.11 R3.1 U2.28 | length 15.8
  Top Layer w0.2: U2.28 5.807,-18.38 5.334,-17.907 5.334,-13.462 5.588,-13.208 10.668,-13.208 11.01,-12.866 IC1.11
STP: IC2.18 U2.11 | length 16.9
  Top Layer w0.2: U2.11 19.931,-19.38 20.07,-19.519 v1@20.232,-19.519 ; v1(20.232,-22.44) 21.502,-22.44 23.661,-20.281 23.661,-17.834 23.778,-17.717 IC2.18
  Bottom Layer w0.2: v1(20.232,-22.44) v1@20.232,-19.519
  other v1: 20.23,-19.519
SWCLK: U2.24
SWDIO: U2.23
USB_D_N: FL1.5 U2.21 | length 15.1
  Top Layer w0.2: FL1.5 5.066,-9.08 5.291,-9.08 5.316,-9.055 5.969,-9.055 5.981,-9.067 5.981,-9.283 v1(6.096,-9.398) ; U2.21 11.219,-15.779 11.169,-15.729 11.169,-15.372 11.323,-15.217 v1(11.323,-14.331)
  Bottom Layer w0.2: v1(6.096,-9.398) 6.096,-9.244 6.36,-8.981 6.36,-8.759 6.711,-8.407 7.699,-8.407 8.05,-8.759 8.05,-14 8.528,-14.478 9.563,-14.478 10.082,-13.959 10.579,-13.959 10.842,-14.222 11.215,-14.222 v1(11.323,-14.331)
USB_D_P: FL1.6 U2.22 | length 14.4
  Top Layer w0.2: FL1.6 5.066,-8.63 5.291,-8.63 5.316,-8.655 6.28,-8.655 v1(7.023,-9.398) ; v1(10.668,-14.986) 10.769,-15.087 10.769,-15.729 10.719,-15.779 U2.22
  Bottom Layer w0.2: v1(7.023,-9.398) 7.023,-9.244 6.76,-8.981 6.76,-8.925 6.877,-8.807 7.533,-8.807 7.65,-8.925 7.65,-14.166 8.362,-14.878 9.729,-14.878 10.248,-14.359 10.414,-14.359 10.559,-14.505 10.559,-14.877 v1(10.668,-14.986)
USBC_D_N: FL1.2 J1.B6 J1.B7 | length 7.5
  Top Layer w0.2: J1.B6 1.281,-9.325 2.803,-9.325 3.023,-9.105 FL1.2 4.279,-9.105 4.406,-8.978 4.406,-8.089 4.192,-7.875 J1.B7
USBC_D_P: FL1.1 J1.A6 J1.A7 | length 4.5
  Top Layer w0.2: J1.A7 1.281,-8.925 1.806,-8.925 2.637,-8.925 2.957,-8.605 ; J1.A6 2.727,-8.375 2.957,-8.605 ; FL1.1 2.957,-8.605
VBUS_CTRL: IC1.6 R1.1 R2.2 | length 7.3
  Top Layer w0.254: R1.1 R2.2 6.929,-5.667 7.318,-5.667 7.493,-5.842 7.493,-6.604 7.962,-7.073 10.353,-7.073 10.51,-7.23 IC1.6
VBUS_IN: D1.2 J1.A4-B9 J1.B4-A9 Q1.5 Q1.6 Q1.7 Q1.8 Q1.9 Q1.10 Q1.11 R1.2
VBUS_PD: C2.2 F1.2 IC1.4 Q1.1 Q1.2 Q1.3 U1.4 U1.6 | length 6
  Top Layer w0.254: IC1.4 11.51,-7.462 12.407,-6.565 Q1.1 ; C2.2 18.161,-6.35 18.826,-7.015 U1.4
VM: C5.1 C6.2 C7.2 C8.2 C9.2 C10.1 C11.1 F1.1 IC2.1 IC2.8
  other v1: 29.884,-18.757 29.249,-18.122 28.614,-12.915 29.503,-12.915
pads on no net: FL1.4 IC1.10 J1.A8 J1.B8 U2.2 U2.3 U2.5 U2.18 U2.25 U2.26

## Polygon pours and split planes (outlines as drawn)
GND on Top Layer "GND_L01_P000" (solid, pour order 0): -5.461,-2.159 36.449,-2.159 36.449,-23.876 -5.461,-23.876
GND on Bottom Layer "GND_L02_P001" (solid, pour order 1): -5.461,-2.159 36.449,-2.159 36.449,-23.876 -5.461,-23.876

## Keep-outs
Keep-Out Layer:
  the board outline again, w0.254

## Other copper
Top Layer:
  region net VM: 27.344,-14.947 27.344,-13.804 27.852,-13.296 30.011,-13.296 30.011,-3.263 26.963,-3.263 26.963,-14.947
  region net VBUS_IN: 1.778,-10.795 1.778,-11.303 -0.889,-11.303 -0.889,-5.969 -0.85,-5.93 1.803,-5.93 1.803,-6.452 1.778,-6.477 -0.127,-6.477 -0.127,-10.795
  region net VBUS_PD: 17.653,-8.128 17.653,-7.366 17.907,-7.112 17.907,-5.461 17.145,-5.461 17.145,-7.112 17.399,-7.366 17.399,-8.128
  region net VBUS_PD: 12.446,-3.81 12.446,-5.588 23.241,-5.588 24.638,-4.191 24.638,-3.302 17.399,-3.302 16.891,-3.81
  region net VM: 27.979,-17.614 29.503,-17.614 30.392,-18.503 30.392,-19.265 27.979,-19.265
  region net BMA1: 27.852,-16.598 30.011,-16.598 32.678,-19.265 36.107,-19.265 36.107,-21.043 32.932,-21.043 32.932,-20.789 28.995,-16.852 27.852,-16.852
  region net BMA2: 27.852,-16.09 30.9,-16.09 31.535,-16.725 36.107,-16.725 36.107,-18.503 32.17,-18.503 30.011,-16.344 27.852,-16.344
  region net BMB1: 27.852,-15.582 30.138,-15.582 31.535,-14.185 36.107,-14.185 36.107,-16.09 31.154,-16.09 30.9,-15.836 27.852,-15.836
  region net BMB2: 27.852,-15.074 28.741,-15.074 32.17,-11.645 36.234,-11.645 36.234,-13.55 31.916,-13.55 30.138,-15.328 27.852,-15.328
  region net VBUS_IN: 0.723,-5.93 2.032,-5.93 2.032,-2.501 9.74,-2.501 9.74,-5.676 7.835,-5.676 7.835,-3.771 2.794,-3.771 2.794,-6.565 0.723,-6.565
Bottom Layer:
  region net VM: 30.392,-19.265 30.392,-12.407 28.233,-12.407 28.233,-13.296 28.868,-13.296 28.868,-19.265

## Text inside footprints (layer, text, board x,y; h text height)
D2: Top Overlay "+" at -4.941,-17.291 h0.5